# EAGLE board max636 (EAGLE 7.1.0)
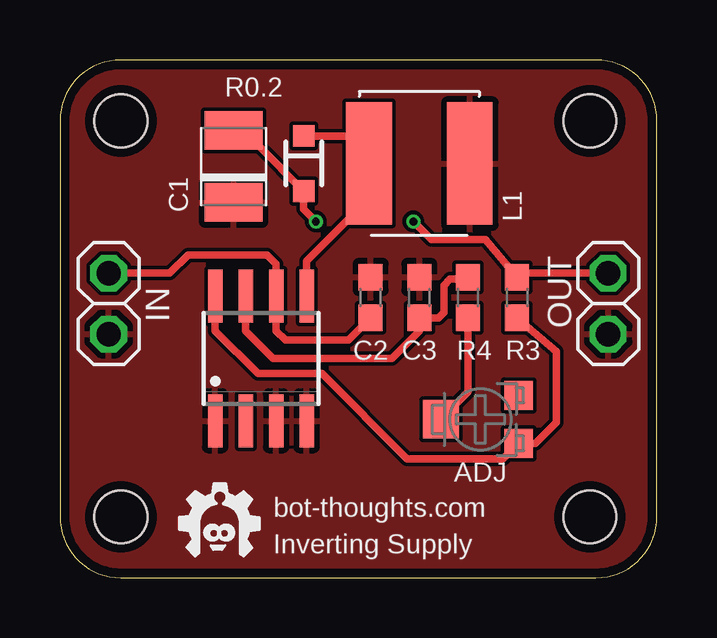
[diagram p0: board, top side]
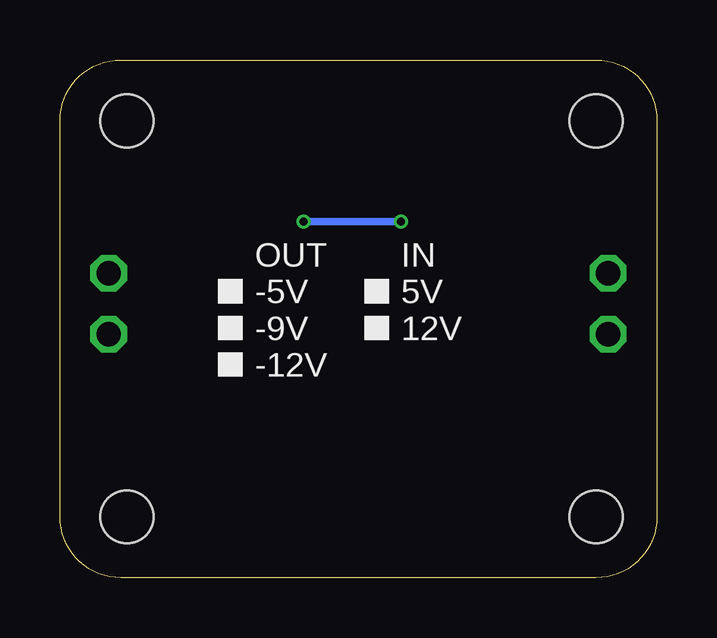
[diagram p1: board, bottom side, seen from below]

Size 24.89 x 21.59 mm. Coordinates in mm from the lower left corner, seen from the top.
Outline: 0,19.05 0,2.54 arc90 2.54,0 22.35,0 arc90 24.89,2.54 24.89,19.05 arc90 22.35,21.59 2.54,21.59 arc90 0,19.05
Copper layers (1*16): Top 0.035559375mm / dielectric 1.6mm / Bottom 0.035559375mm
Design rules "oshpark-2layer": minimum track width 6mil, minimum drill 10mil, track to track 6mil, track to pad 6mil, pad to pad 6mil, via to via 6mil, smd to smd 0mil, copper to edge 15mil, drill to drill 6mil, minimum pad ring 5mil, minimum via ring 5mil, stop-mask expansion 2.5mil, vias tented up to drill 13mil, thermal gap 10mil
Holes 2.2 mm at 2.54,2.54 2.54,19.05 22.1,19.05 22.1,2.54

## Footprints (pad centres in the part's own frame; a part is rotated, then mirrored left to right if it is on the bottom)
35WR = smd 1.2 x 1.2: 1 -1,-1.6; 3 1,-1.6 | smd 1.6 x 1.5: 2 0,1.65
SMC_B = smd 1.6 x 2.4: + -1.5,0; - 1.5,0
0603 = smd 1.1 x 1: 1 -0.85,0; 2 0.85,0
SOD-323 = smd 0.9 x 0.9: A 1.15,0; C -1.15,0
1X01-S = drill 1.016 octagon: 1 0,0
VLS6045EX = smd 1.9 x 5.1: 1 -2.1,0; 2 2.1,0
SO08 = smd 0.6 x 2.2: 1 -1.905,-2.6; 2 -0.635,-2.6; 3 0.635,-2.6; 4 1.905,-2.6; 5 1.905,2.6; 6 0.635,2.6; 7 -0.635,2.6; 8 -1.905,2.6

## Placement (x,y rotation side)
ADJ  10K  [35WR]  17.53,6.6 90 top
C1  107  [SMC_B]  7.24,17.14 90 top
C2  106  [0603]  12.95,11.68 90 top
C3  104  [0603]  14.99,11.68 90 top
D1  1N5817  [SOD-323]  10.16,17.27 270 top
J1  +V  [1X01-S]  2.03,12.7 90 top
J2  -V  [1X01-S]  22.86,12.7 90 top
J3  GND  [1X01-S]  22.86,10.16 270 top
J4  GND  [1X01-S]  2.03,10.16 270 top
L1  [VLS6045EX]  14.99,17.27 180 top
R3  150K  [0603]  19.05,11.68 270 top
R4  39K  [0603]  17.02,11.68 90 top
U1  MAX636  [SO08]  8.38,9.14 0 top
U$1  BTLOGO-LOGO-SM  [BTLOGOS]  6.6,0.76 0 top

## Library data of the parts
ADJ J1-J4 = bt_electromech
C1-C3 R3 R4 = bt_rcl
D1 = bt_diode
L1 = bt_inductor; PN: SRN6045-XXXM
U1 = bt_regulator
U$1 = bt

## Nets
GND: C1.+ C2.2 C3.2 J3.1 J4.1 L1.1 U1.1 U1.3 U1.4
N$1: D1.C L1.2 U1.5
N$2: ADJ.1 R3.2 U1.8
N$3: C1.- D1.A J2.1 R3.1
N$5: ADJ.2 R4.1
N$6: C3.1 R4.2 U1.7
VCC: C2.1 J1.1 U1.6

## Tracks (layer width: path | path; a pad name or v marks a point on that pad's centre or on a via)
GND
  pour Top: 22.1,0 2.54,0 arc-90 0,2.54 0,19.05 arc-90 2.54,21.59 22.1,21.59 arc-90 24.64,19.05 24.64,2.54 arc-90
N$1
  Top 0.305: D1.C 12.5,18.42 L1.2 12.7,17.09 12.7,15.62 10.29,13.21 U1.5
N$2
  Top 0.305: U1.8 6.48,10.29 8.26,8.51 10.92,8.51 14.48,4.95 18.48,4.95 ADJ.1 19.83,5.6 20.7,6.48 20.7,9.44 R3.2
N$3  (via drill 0.33)
  Top 0.305: C1.- 8.27,18.01 D1.A 10.16,15.37 v10.67,14.86 | J2.1 19.14,12.7 R3.1 17.74,14.1 15.49,14.1 v14.73,14.86
  Bottom 0.305: v10.67,14.86 v14.73,14.86
N$5
  Top 0.305: R4.1 17.02,7.75 ADJ.2
N$6
  Top 0.305: U1.7 7.75,10.29 8.89,9.14 13.84,9.14 14.99,10.29 C3.1 15.79,10.83 16,11.05 16,12.19 16.26,12.45 16.93,12.45 R4.2
VCC
  Top 0.305: J1.1 4.57,12.7 5.33,13.46 8.64,13.46 9.02,13.08 U1.6 9.02,10.29 9.4,9.91 12.03,9.91 C2.1

## Text on the board
tNames: R0.2 | IN | OUT | bot-thoughts.com | Inverting Supply
bNames: IN / 5V / 12V | OUT / -5V / -9V / -12V